# EAGLE board PiDGCv2 (EAGLE 9.6.2)
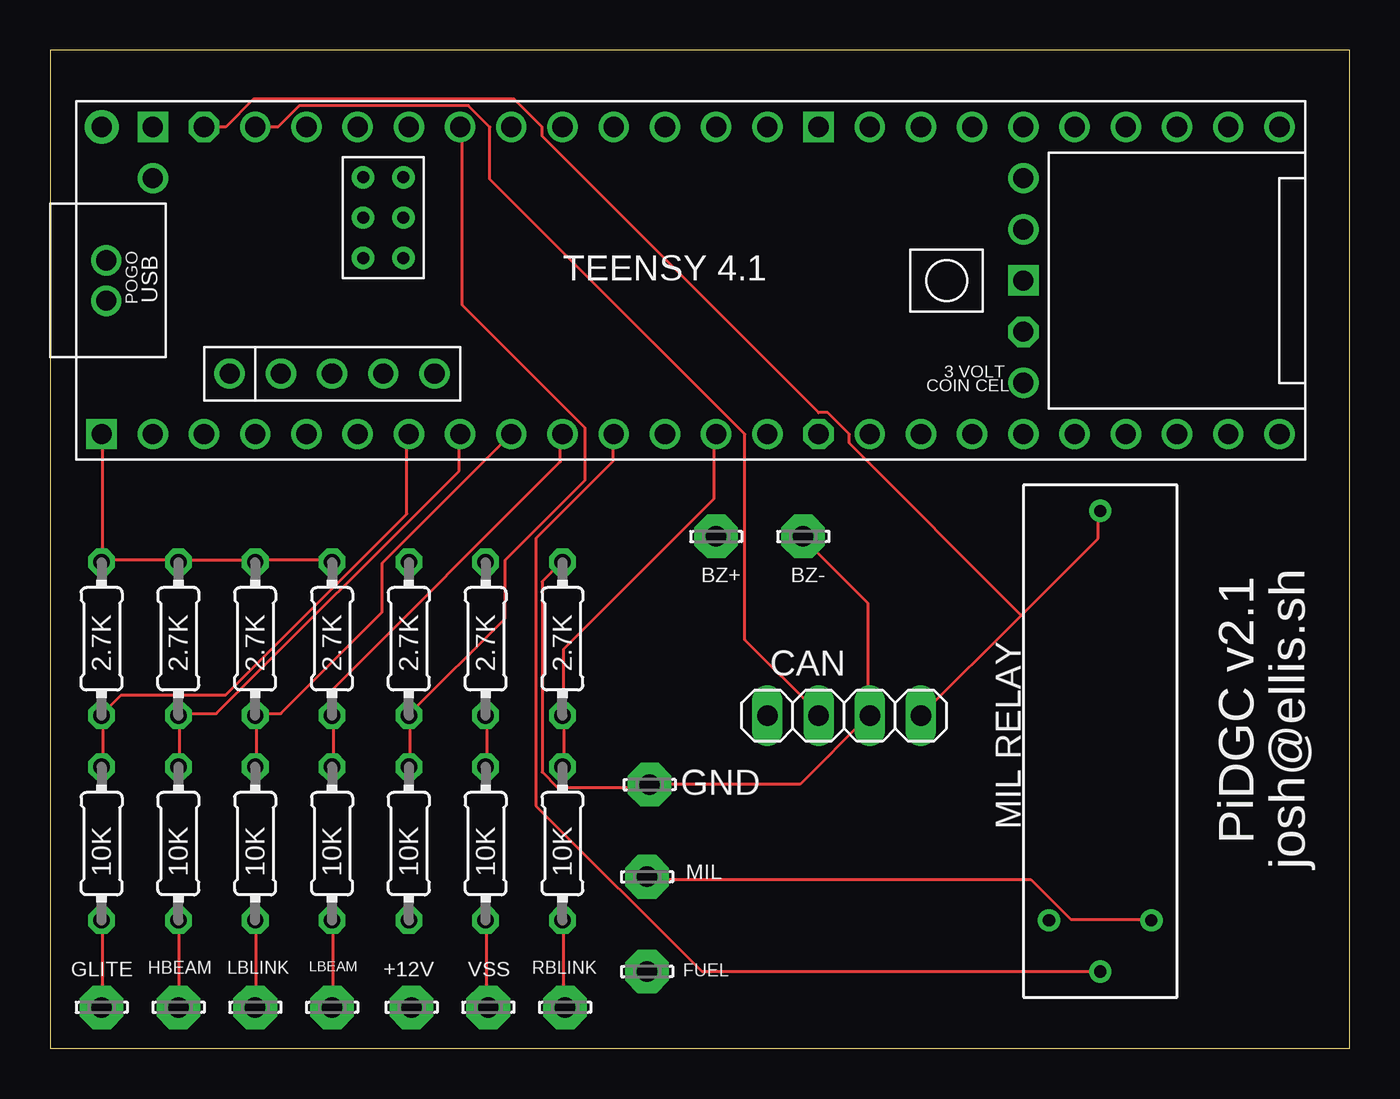
[diagram p0: board, top side]
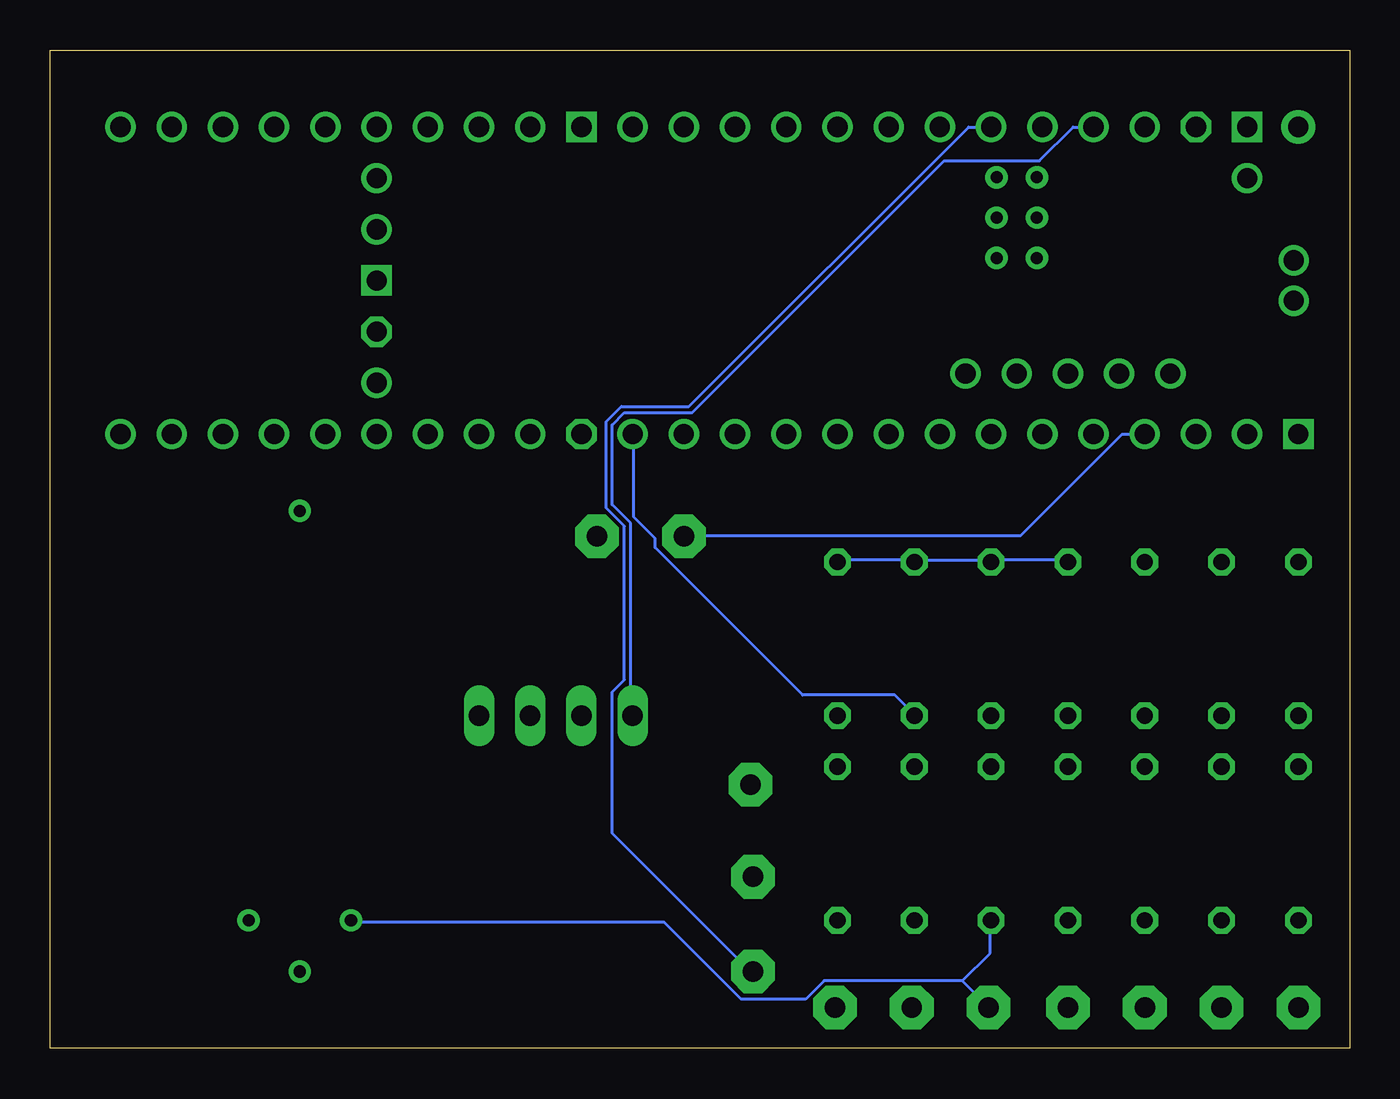
[diagram p1: board, bottom side, seen from below]

Size 64.44 x 49.52 mm. Coordinates in mm from the lower left corner, seen from the top.
Outline: 0,0 64.44,0 64.44,49.52 0,49.52 0,0
Copper layers (1*16): Top 0.035mm / dielectric 1.5mm / Bottom 0.035mm
Design rules "default": minimum track width 6mil, minimum drill 0.35mm, track to track 6mil, track to pad 6mil, pad to pad 6mil, via to via 6mil, smd to smd 6mil, copper to edge 40mil, drill to drill 6mil, minimum pad ring 10mil, minimum via ring 8mil, stop-mask expansion 4mil, vias tented up to drill 0mil, thermal gap 10mil

## Footprints (pad centres in the part's own frame; a part is rotated, then mirrored left to right if it is on the bottom)
LSP10 = drill 1.016 pad 2.159 octagon: MP 0,0
1X04 = drill 1.016 long: 1 -3.81,0; 2 -1.27,0; 3 1.27,0; 4 3.81,0
RELAY = drill 0.6: 1 -3.81,-2.54; 2 -3.81,2.54; 3 -6.35,0; 4 16.51,0
0204/7 = drill 0.813 octagon: 1 -3.81,0; 2 3.81,0
TEENSY41 = drill 1: 0-RX1/CS1/CRX2 -27.94,-7.62; 1-TX1/MISO1/CTX2 -25.4,-7.62; 2-OUT2 -22.86,-7.62; 3-LRCLK2 -20.32,-7.62; 4-BCLK2 -17.78,-7.62; 5-IN2 -15.24,-7.62; 6-OUT1D -12.7,-7.62; 7-RX2/OUT1A -10.16,-7.62; 8-TX2/IN2 -7.62,-7.62; 9-OUT1C -5.08,-7.62; 10-CS\MQSR -2.54,-7.62; 11-MOSI/CTX1 0,-7.62; 12-MISO/MQSL 2.54,-7.62; 13-SCK/LED 2.54,7.62; 14-A0/TX3/SPDIF_OUT 0,7.62; 15-A1/RX3/SPDIF_IN -2.54,7.62; 16-A2/RX4/SCL1 -5.08,7.62; 17-A3/TX4/SDA1 -7.62,7.62; 18-A4/SDA0 -10.16,7.62; 19-A5/SCL0 -12.7,7.62; 20-A6/TX5/LRCLK1 -15.24,7.62; 21-A7/RX5/BCLK1 -17.78,7.62; 22-A8/CTX1 -20.32,7.62; 23-A9/CRX1/MCLK1 -22.86,7.62; 24-A10/TX6/SCL2 7.62,-7.62; 25-A11/RX6/SDA2 10.16,-7.62; 26-A12/MOSI1 12.7,-7.62; 27-A13/SCK1 15.24,-7.62; 28-RX7 17.78,-7.62; 29-TX7 20.32,-7.62; 30-CRX3 22.86,-7.62; 31-CTX3 25.4,-7.62; 32-OUT1B 27.94,-7.62; 33-MCLK2 27.94,7.62; 34-RX8 25.4,7.62; 35-TX8 22.86,7.62; 36-PWM 20.32,7.62; 37-PWM 17.78,7.62; 38-A14/CS/IN1 15.24,7.62; 39-A15/CS/OUT1A 12.7,7.62; 40-A16/CS1 10.16,7.62; 41-A17/MISO1 7.62,7.62; +5V -24.13,-4.62; D+ -30.25,-1; D- -30.25,1; DM -21.59,-4.62; DP -19.05,-4.62; GND4 -16.51,-4.62; GND5 -13.97,-4.62; ON/OFF 15.24,5.08; PROGRAM 15.24,2.54; VBAT 15.24,-5.08; VUSB -27.94,5.08 | drill 1 octagon: 3V3-1 5.08,-7.62; 3V3-2 15.24,-2.54; 3V3-3 -25.4,7.62 | drill 0.6: G -15.51,3.12; LED -17.51,3.12; R+ -17.51,5.12; R- -15.51,5.12; T+ -15.51,1.12; T- -17.51,1.12 | drill 1 square: GND1 -30.48,-7.62; GND2 15.24,0; GND3 5.08,7.62; GND6 -27.94,7.62 | drill 1 pad 1.676: VIN -30.48,7.62

## Placement (x,y rotation side)
+12V  LSP10  [LSP10]  17.91,2.03 0 top
BZ+  LSP10  [LSP10]  33.02,25.4 0 top
BZ-  LSP10  [LSP10]  37.34,25.4 0 top
CAN  [1X04]  39.37,16.51 180 top
FUEL  LSP10  [LSP10]  29.59,3.81 0 top
GLITE  LSP10  [LSP10]  2.54,2.03 0 top
GND  LSP10  [LSP10]  29.72,13.08 0 top
HBEAM  LSP10  [LSP10]  6.35,2.03 0 top
LBEAM  LSP10  [LSP10]  13.97,2.03 0 top
LBLINK  LSP10  [LSP10]  10.16,2.03 0 top
MIL  LSP10  [LSP10]  29.59,8.51 0 top
MIL_RELAY  BR-1050-VP  [RELAY]  52.07,10.16 90 top
R1  10K  [0204/7]  2.54,10.16 90 top
R2  2.7K  [0204/7]  2.54,20.32 90 top
R3  10K  [0204/7]  6.35,10.16 90 top
R4  2.7K  [0204/7]  6.35,20.32 90 top
R5  10K  [0204/7]  10.16,10.16 90 top
R6  2.7K  [0204/7]  10.16,20.32 90 top
R7  10K  [0204/7]  13.97,10.16 90 top
R8  2.7K  [0204/7]  13.97,20.32 90 top
R9  10K  [0204/7]  17.78,10.16 90 top
R10  2.7K  [0204/7]  17.78,20.32 90 top
R11  10K  [0204/7]  21.59,10.16 90 top
R12  2.7K  [0204/7]  21.59,20.32 90 top
R15  10K  [0204/7]  25.4,10.16 90 top
R16  2.7K  [0204/7]  25.4,20.32 90 top
RBLINK  LSP10  [LSP10]  25.53,2.03 0 top
U$1  TEENSY41  [TEENSY41]  33.02,38.1 0 top
VSS  LSP10  [LSP10]  21.72,2.03 0 top

## Library data of the parts
+12V BZ+ BZ- FUEL GLITE GND HBEAM LBEAM LBLINK MIL RBLINK VSS = solpad
CAN = pinhead
MIL_RELAY = bestar
R1-R12 R15 R16 = rcl; SPICEPREFIX: R
U$1 = teensy

## Nets
3.3V: CAN.1 MIL_RELAY.4 U$1.3V3-3
12V: +12V.MP MIL_RELAY.2 R9.1
GND: BZ-.MP CAN.2 GND.MP R2.2 R4.2 R6.2 R8.2 R10.2 R12.2 R16.2 U$1.GND1
N$1: R3.2 R4.1 U$1.6-OUT1D
N$2: R1.2 R2.1 U$1.5-IN2
N$3: GLITE.MP R1.1
N$4: HBEAM.MP R3.1
N$5: R5.2 R6.1 U$1.7-RX2/OUT1A
N$6: LBLINK.MP R5.1
N$7: R7.2 R8.1 U$1.8-TX2/IN2
N$8: LBEAM.MP R7.1
N$9: FUEL.MP U$1.20-A6/TX5/LRCLK1
N$10: R9.2 R10.1 U$1.19-A5/SCL0
N$12: R11.2 R12.1 U$1.12-MISO/MQSL
N$13: R11.1 VSS.MP
N$16: R15.2 R16.1 U$1.11-MOSI/CTX1
N$17: R15.1 RBLINK.MP
N$19: MIL.MP MIL_RELAY.1
N$20: MIL_RELAY.3 U$1.9-OUT1C
N$21: BZ+.MP U$1.2-OUT2
RX: CAN.3 U$1.23-A9/CRX1/MCLK1
TX: CAN.4 U$1.22-A8/CTX1

## Tracks (layer width: path | path; a pad name or v marks a point on that pad's centre or on a via)
3.3V
  Top 0.152: CAN.1 48.16,21.49 | 48.16,21.49 51.97,25.3 51.97,26.67 MIL_RELAY.4 | U$1.3V3-3 8.69,45.72 10.06,47.09 23.01,47.09 24.38,45.72 24.38,45.26 38.1,31.55 38.56,31.55 39.62,30.48 39.62,30.02 48.16,21.49
12V
  Bottom 0.152: 19.2,3.35 26.06,3.35 26.98,2.44 30.18,2.44 33.98,6.25 49.53,6.25 MIL_RELAY.2 | 19.2,3.35 17.98,2.13 +12V.MP | 19.2,3.35 17.83,4.72 17.83,6.25 R9.1
GND
  Top 0.152: BZ-.MP 37.34,25.3 40.54,22.1 40.54,16.61 CAN.2 40.54,16.46 37.19,13.11 29.72,13.11 GND.MP 29.72,12.95 25.15,12.95 24.38,13.72 24.38,23.16 25.3,24.08 R16.2 | R8.2 13.87,24.23 10.21,24.23 R6.2 10.06,24.23 6.4,24.23 R4.2 6.25,24.23 2.59,24.23 | 2.59,24.23 2.59,30.48 U$1.GND1 | 2.59,24.23 R2.2
  Bottom 0.152: R16.2 25.3,24.23 21.64,24.23 R12.2 21.49,24.23 17.83,24.23 R10.2 17.68,24.23 14.02,24.23 R8.2
N$1
  Top 0.152: R3.2 6.4,14.02 6.4,16.46 R4.1 6.4,16.61 8.23,16.61 20.27,28.65 20.27,30.48 U$1.6-OUT1D
N$2
  Top 0.152: R1.2 2.59,14.02 2.59,16.46 R2.1 2.59,16.61 3.5,17.53 8.69,17.53 17.68,26.52 17.68,30.48 U$1.5-IN2
N$3
  Top 0.152: R1.1 2.59,6.25 2.59,2.13 GLITE.MP
N$4
  Top 0.152: R3.1 6.4,6.25 6.4,2.13 HBEAM.MP
N$5
  Top 0.152: R5.2 10.21,14.02 10.21,16.46 R6.1 10.21,16.61 11.43,16.61 16.46,21.64 16.46,24.08 U$1.7-RX2/OUT1A
N$6
  Top 0.152: R5.1 10.21,6.25 10.21,2.13 LBLINK.MP
N$7
  Top 0.152: R7.2 14.02,14.02 14.02,16.46 R8.1 14.02,16.61 14.02,17.83 25.3,29.11 25.3,30.48 U$1.8-TX2/IN2
N$8
  Top 0.152: R7.1 14.02,6.25 14.02,2.13 LBEAM.MP
N$9
  Bottom 0.152: U$1.20-A6/TX5/LRCLK1 18.9,45.72 32.77,31.85 36.12,31.85 36.88,31.09 36.88,26.82 35.97,25.91 35.97,18.29 36.58,17.68 36.58,10.67 29.72,3.81 FUEL.MP
N$10
  Top 0.152: R9.2 17.83,14.02 17.83,16.46 R10.1 17.83,16.61 22.55,21.34 22.55,24.23 26.52,28.19 26.52,30.79 20.42,36.88 20.42,45.72 U$1.19-A5/SCL0
N$12
  Top 0.152: R11.2 21.64,14.02 21.64,16.46 R12.1
  Bottom 0.152: U$1.12-MISO/MQSL 35.51,30.48 35.51,26.36 34.44,25.3 34.44,24.84 27.13,17.53 22.55,17.53 21.64,16.61 R12.1
N$13
  Top 0.152: R11.1 21.64,6.25 21.64,2.13 VSS.MP
N$16
  Top 0.152: R15.2 25.45,14.02 25.45,16.46 R16.1 25.45,16.61 25.45,19.81 32.92,27.28 32.92,30.48 U$1.11-MOSI/CTX1
N$17
  Top 0.152: R15.1 25.45,6.25 25.45,2.13 RBLINK.MP
N$19
  Top 0.152: MIL_RELAY.1 54.56,6.4 50.6,6.4 48.62,8.38 29.72,8.38 MIL.MP
N$20
  Top 0.152: MIL_RELAY.3 32.31,3.81 24.08,12.04 24.08,25.3 27.89,29.11 27.89,30.48 U$1.9-OUT1C
N$21
  Bottom 0.152: U$1.2-OUT2 11.28,30.48 16.31,25.45 32.92,25.45 BZ+.MP
RX
  Top 0.152: U$1.23-A9/CRX1/MCLK1 11.28,45.72 12.34,46.79 20.73,46.79 21.79,45.72 21.79,43.13 34.44,30.48 34.44,20.27 38.1,16.61 CAN.3
TX
  Bottom 0.152: U$1.22-A8/CTX1 13.72,45.72 15.39,44.04 20.12,44.04 32.61,31.55 35.97,31.55 36.58,30.94 36.58,26.98 35.66,26.06 35.66,16.61 CAN.4

## Text on the board
tNames: MIL RELAY | PiDGC v2.1 | josh@ellis.sh